# Altium PCB 02.PcbDoc
Units mm, origin at the board's own origin, x right, y up, seen from the top; angles counter-clockwise.
Board outline 59.69 x 72.52 mm, 2 copper layers (Top Layer, Bottom Layer); 31 components, 0 nets, 123 pads, 0 vias.
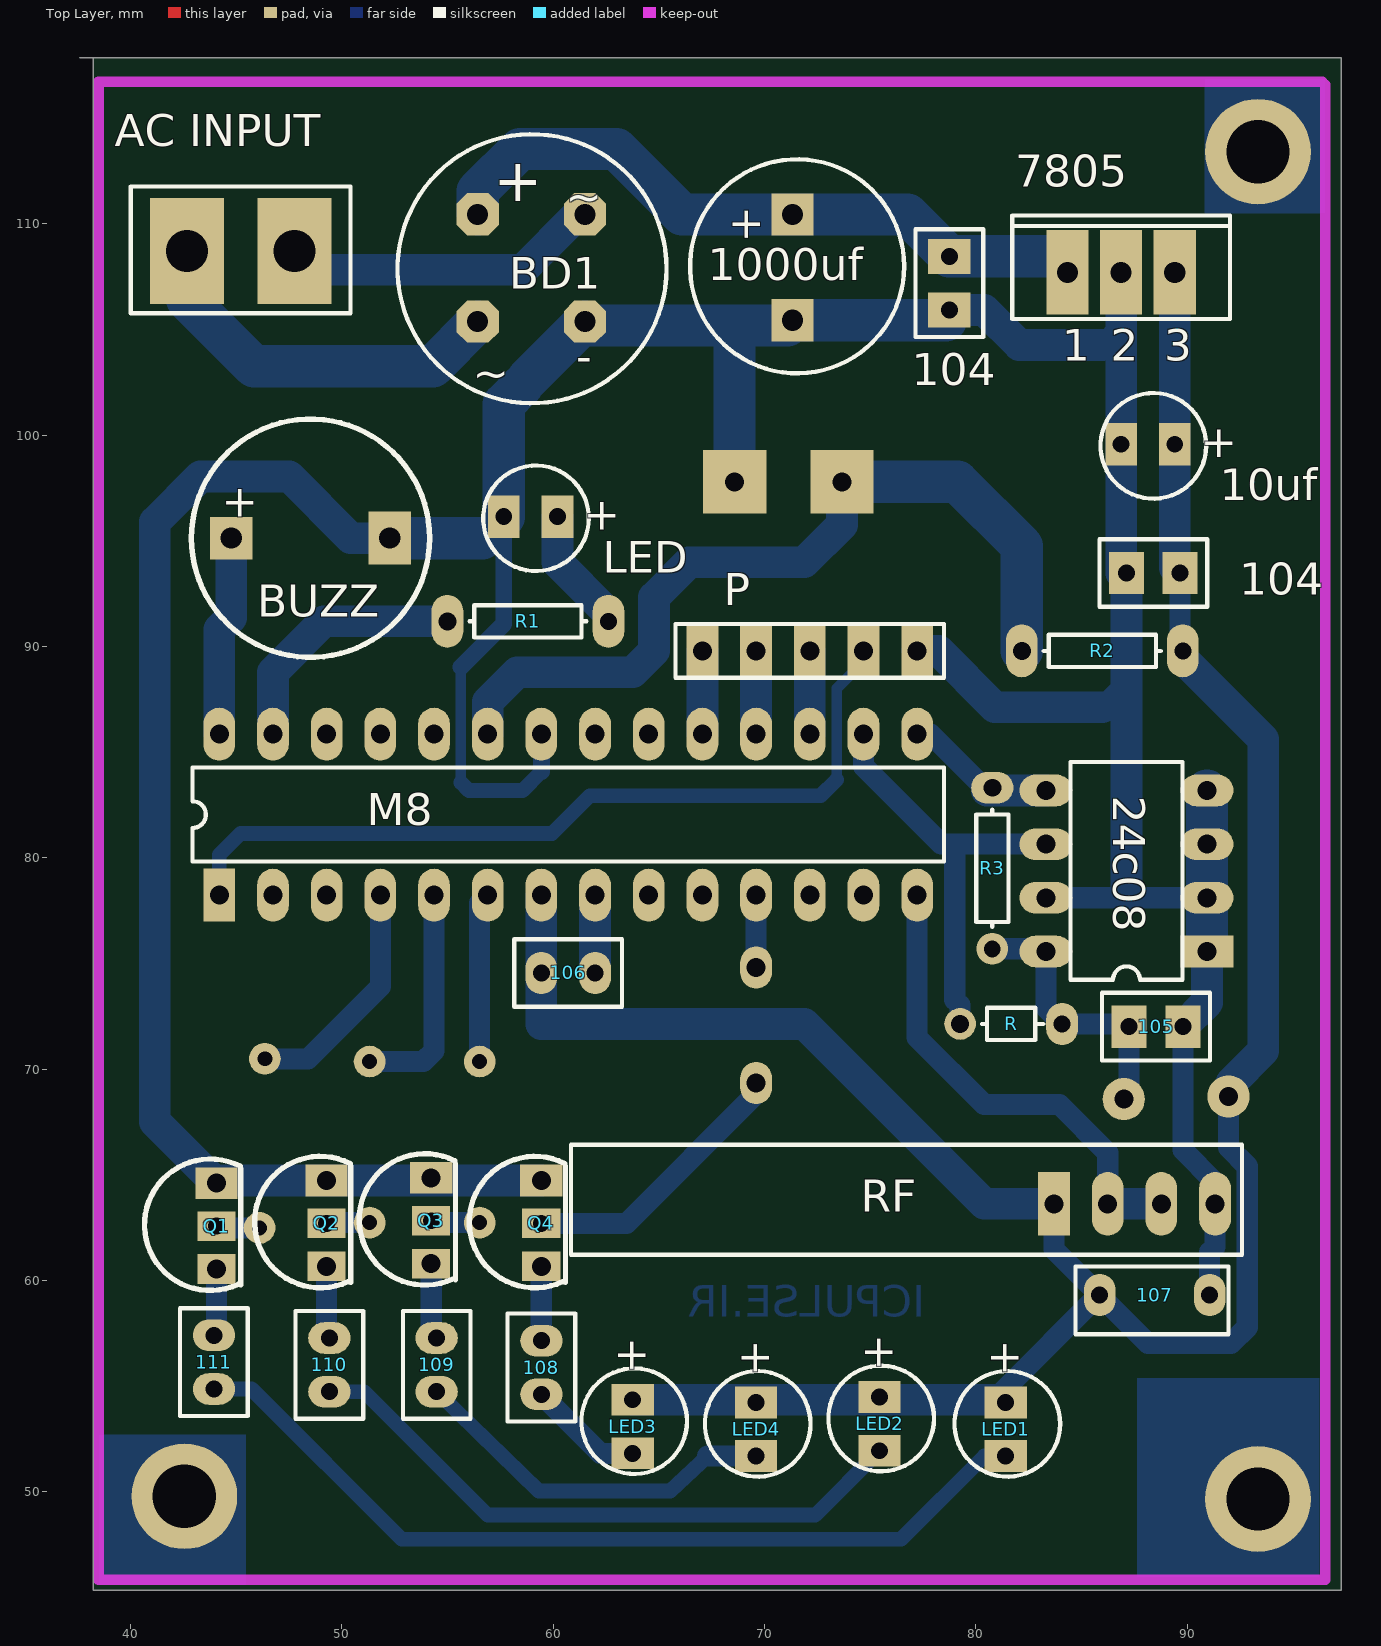
[diagram p0: Top Layer view]
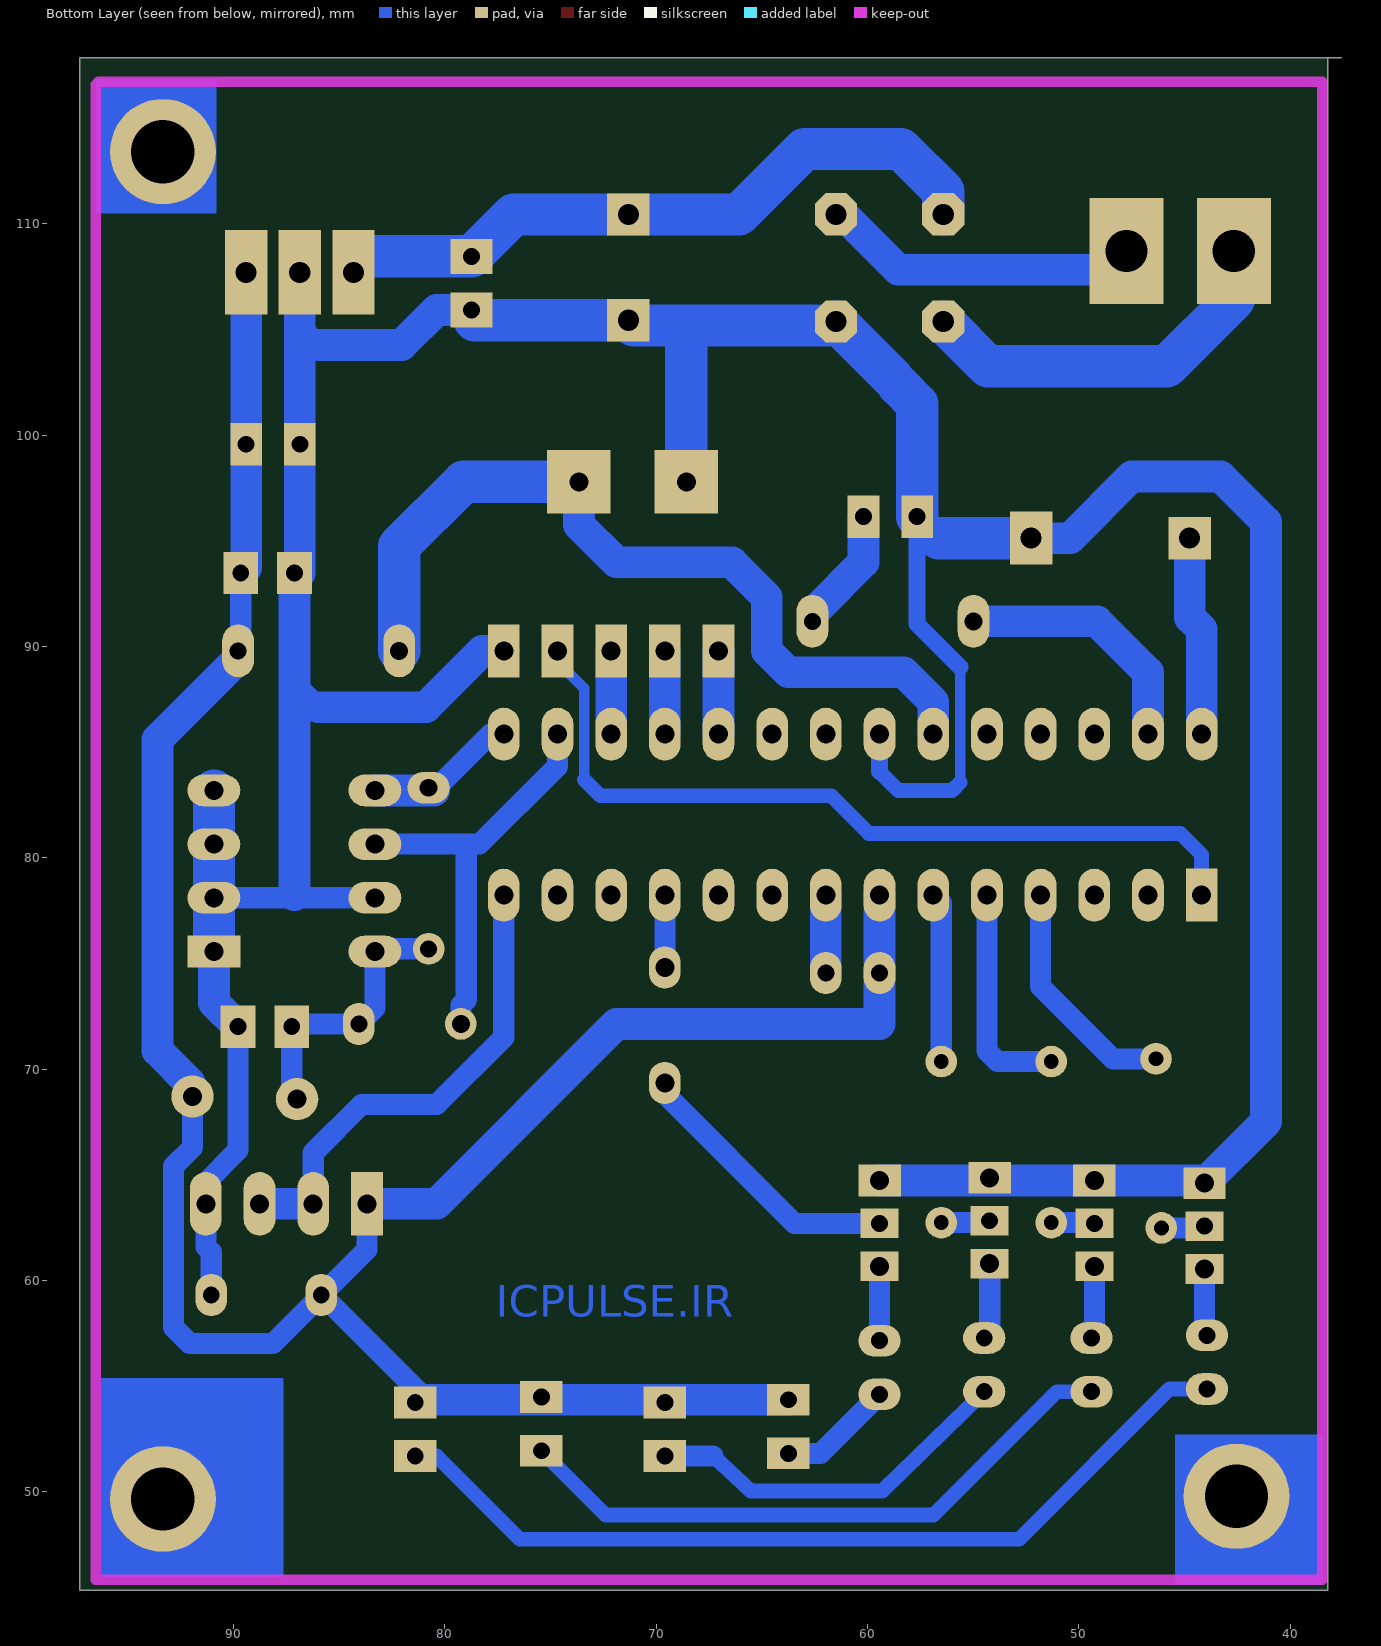
[diagram p1: Bottom Layer view, seen from below]

## Layer stack, top to bottom
Top Solder: solder mask 0.0102, Solder Resist, Dk 3.5
Top Layer: signal copper 0.0356
Dielectric1: dielectric 0.32, FR-4, Dk 4.8
Bottom Layer: signal copper 0.0356
Bottom Solder: solder mask 0.0102, Solder Resist, Dk 3.5

## Board outline
37.592,117.856 97.282,117.856 97.282,45.339 38.227,45.339 38.227,117.856

## Design rules (kind name [scope] priority, off if disabled: settings)
Clearance [All] p1: gap=0.254 ignorepadtopadclearanceinfootprint=FALSE except(0: Arc-Hole Track-Hole SMDPad-Hole THPad-Hole Via-Hole Fill-Hole Poly-Hole Region-Hole Text-Hole)
FabricationTestPointUsage TestPointUsage [All] p1: valid=0 allowmultiple=FALSE
FabricationTestpoint Testpoint [All] p1: side=3 testpointundercomponent=TRUE minsize=1.016 maxsize=2.54 preferedsize=1.524 minholesize=0 maxholesize=1.016 preferedholesize=0.813 testpointgrid=0.025 allowsidetop=TRUE allowsidebottom=TRUE usegrid=TRUE gridtolerance=0
PolygonConnect [All] p1: connectstyle=Relief reliefconductorwidth=0.254 reliefentries=4 polygonreliefangle="90 Angle" airgapwidth=0.254
RoutingVias [All] p1: holewidth=0.711 width=1.27 viastyle="Through Hole" minholewidth=0.711 minwidth=1.27 maxholewidth=0.711 maxwidth=1.27
SolderMaskExpansion [All] p1: expansion=0.102
Width [All] p1: maxlimit=0.254 minlimit=0.254 preferedwidth=0.254
28 further rules are at their usual default settings.

## Components (designator, comment, footprint, x,y, rotation, side; value= is the part's Value field where it differs from the comment)
10uf "100uF" cap02 79.248,94.488 r270 top (schematic designator C5)
24c08 "Comment" DIP-8 87.122,79.375 r90 top
104 "22pF" VP32-3.2#1 78.74,107.188 r90 top (schematic designator C7)
104 "22pF" VP32-3.2#1 88.392,93.472 r180 top (schematic designator C7)
105 "22pF" VP32-3.2#1 88.519,72.009 r180 top (schematic designator C7)
106 "22pF" VP32-3.2#2 60.706,74.549 r180 top (schematic designator C7)
107 "22pF" VP32-3.2#3 87.503,59.055 r180 top (schematic designator C7)
108 "22pF" VP32-3.2#2 59.436,55.88 r270 top (schematic designator C7)
109 "22pF" VP32-3.2#2 54.483,56.007 r270 top (schematic designator C7)
110 "22pF" VP32-3.2#2 49.403,56.007 r270 top (schematic designator C7)
111 "22pF" VP32-3.2#2 43.942,56.134 r270 top (schematic designator C7)
1000uf "Comment" CAPPR5-5x5 71.322,107.937 r270 top
7805 "Comment" TO-262-AA 86.868,107.696 r0 top
"AC INPUT" "Comment" HDR1X2 47.752,108.712 r180 top
BUZZ "Buzzer" Buzzer1 49.784,87.503 r0 top
LED "100uF" cap02 50.038,91.059 r270 top (schematic designator C5)
LED1 "100uF" cap02 86.487,44.069 r0 top (schematic designator C5)
LED2 "100uF" cap02 80.518,44.323 r0 top (schematic designator C5)
LED3 "100uF" cap02 68.834,44.196 r0 top (schematic designator C5)
LED4 "100uF" cap02 74.676,44.069 r0 top (schematic designator C5)
M8 "Comment" 28P3 60.706,82.042 r0 top
P "Comment" HDR1X5 67.056,89.789 r0 top
Q1 "BC546" tr1 54.229,73.279 r90 top
Q2 "BC546" tr1 59.436,73.406 r90 top (schematic designator Q1)
Q3 "BC546" tr1 64.389,73.533 r90 top (schematic designator Q1)
Q4 "BC546" tr1 69.596,73.406 r90 top (schematic designator Q1)
R "Comment" AXIAL-0.3#1 83.058,72.136 r180 top
R1 "Comment" AXIAL-0.3#2 58.801,91.186 r180 top
R2 "Comment" AXIAL-0.3#2 85.979,89.789 r180 top
R3 "Comment" AXIAL-0.3#3 80.772,79.502 r90 top
RF "Comment" HDR1X4 83.693,63.627 r0 top

## Footprints (in the part's own frame and the unit in brackets; to place one, negate y for a bottom-side part, rotate by r counter-clockwise, add the part's x,y. Pads: shape width x height; smd on the part's side, far side on the other; paste and mask are expansions set on the pad)
28P3 [mm] "DIP; 28 Leads; Row Spacing 7.62 mm; Pitch 2.54 mm"
  rect 1.5x2.5 hole 0.9: 1(-16.51,-3.81)
  oval 1.5x2.5 hole 0.9: 2(-13.97,-3.81) 3(-11.43,-3.81) 4(-8.89,-3.81) 5(-6.35,-3.81) 6(-3.81,-3.81) 7(-1.27,-3.81) 8(1.27,-3.81) 9(3.81,-3.81) 10(6.35,-3.81) 11(8.89,-3.81) 12(11.43,-3.81) 13(13.97,-3.81) 14(16.51,-3.81) 15(16.51,3.81) 16(13.97,3.81) 17(11.43,3.81) 18(8.89,3.81) 19(6.35,3.81) 20(3.81,3.81) 21(1.27,3.81) 22(-1.27,3.81) 23(-3.81,3.81) 24(-6.35,3.81) 25(-8.89,3.81) 26(-11.43,3.81) 27(-13.97,3.81) 28(-16.51,3.81)
  silkscreen extent -17.78,-2.23 17.78,2.23
AXIAL-0.3#1 [mm] "Resistor; 2 Leads"
  oval 1.5x2 hole 0.8: 1(-1.016,0)
  round 1.5 hole 0.85: 2(3.81,0)
  silkscreen extent -0.13,-0.76 2.77,0.76
AXIAL-0.3#2 [mm] "Resistor; 2 Leads"
  oval 1.5x2.5 hole 0.8: 1(-3.81,0)
  oval 1.5x2.5 hole 0.85: 2(3.81,0)
  silkscreen extent -2.77,-0.76 2.77,0.76
AXIAL-0.3#3 [mm] "Resistor; 2 Leads"
  round 1.5 hole 0.8: 1(-3.81,0)
  oval 1.5x2 hole 0.85: 2(3.81,0)
  silkscreen extent -2.77,-0.76 2.77,0.76
Buzzer1 [mm]
  rect 2x2 hole 1: 1(-5.02,7.62)
  rect 2x2.5 hole 1: 2(2.48,7.62)
  silkscreen extent -6.91,1.99 4.37,13.25
cap02 [mm]
  rect 2x1.5 hole 0.8: 1(-5.08,10.16) 2(-5.08,7.62)
  silkscreen extent -7.5,6.65 -2.5,11.64
CAPPR5-5x5 [mm] "Capacitor, Electrolytic, Radial; Body 5 x 5 mm (Dia.xH typ); Pin Spacing 5 mm (typ)"
  rect 2x2 hole 1: 1(-2.5,0) 2(2.5,0)
DIP-8 [mm] "DIP; 8 Leads; Row Spacing 7.62 mm; Pitch 2.54 mm"
  rect 1.5x2.5 hole 0.9: 1(-3.81,-3.81)
  oval 1.5x2.5 hole 0.9: 2(-1.27,-3.81) 3(1.27,-3.81) 4(3.81,-3.81) 5(3.81,3.81) 6(1.27,3.81) 7(-1.27,3.81) 8(-3.81,3.81)
  silkscreen extent -5.15,-2.65 5.15,2.65
HDR1X2 [mm] "Connector; Header; 2 Position"
  rect 3.5x5 hole 2: 1(0,0) 2(5.08,0)
  silkscreen extent -2.65,-3.05 7.75,2.95
HDR1X4 [mm] "Connector; Header; 4 Position"
  rect 1.5x3 hole 0.9: 1(0,0)
  oval 1.5x3 hole 0.9: 2(2.54,0) 3(5.08,0) 4(7.62,0)
  silkscreen extent -22.86,-2.41 8.89,2.79
HDR1X5 [mm] "Connector; Header; 5 Position"
  rect 1.5x2.5 hole 0.9: 1(0,0) 2(2.54,0) 3(5.08,0) 4(7.62,0) 5(10.16,0)
  silkscreen extent -1.27,-1.27 11.43,1.27
TO-262-AA [mm] "TO, Thru-Hole, Vertical, Heatsink Mounted; 3 In-Line Leads; Pitch 2.54 mm"
  rect 2x4 hole 1: 1(-2.54,0) 2(0,0) 3(2.54,0)
  silkscreen extent -5.15,-2.2 5.15,2.7
tr1 [mm]
  rect 1.5x2 hole 0.9: 1(-8.675,10.165)
  rect 1.4x1.8 hole 0.8: 2(-10.707,10.165)
  rect 1.4x1.8 hole 0.9: 3(-12.739,10.165)
  silkscreen extent -13.75,9.02 -7.54,13.57
VP32-3.2#1 [mm] "Capacitor, Ceramic, Thru-Hole, Dipped Radial; Body 5.1 x 3.2 mm (WxT) Pin Spacing 2.54 mm (typ)"
  rect 1.65x2 hole 0.8: 1(-1.27,0) 2(1.27,0)
  silkscreen extent -2.55,-1.6 2.55,1.6
VP32-3.2#2 [mm] "Capacitor, Ceramic, Thru-Hole, Dipped Radial; Body 5.1 x 3.2 mm (WxT) Pin Spacing 2.54 mm (typ)"
  oval 1.5x2 hole 0.8: 1(-1.27,0) 2(1.27,0)
  silkscreen extent -2.55,-1.6 2.55,1.6
VP32-3.2#3 [mm] "Capacitor, Ceramic, Thru-Hole, Dipped Radial; Body 5.1 x 3.2 mm (WxT) Pin Spacing 2.54 mm (typ)"
  oval 1.5x2 hole 0.8: 1(-3.556,-0.254) 2(1.651,-0.254)
  silkscreen extent -4.44,-1.6 2.79,1.6

## Part data
10uf LED LED1 LED2 LED3 LED4: library part "Cap Pol1", "Polarized Capacitor (Radial)"
24c08 7805 M8 P R R1 R2 R3 RF: library part COAX-M
104 104 105 106 107 108 109 110 111: library part Cap, "Capacitor"
1000uf: library part "Header 8"
"AC INPUT": library part MAX7219CNG
BUZZ: "Magnetic Transducer Buzzer"
Q1 Q2 Q3 Q4: library part 2N3904, "NPN General Purpose Amplifier"

## Free pads (board coordinates)
  rect 3x3 hole 0.9: 0(73.66,97.79) 1(68.58,97.79)
  oct 2x2 hole 1: 1(56.422,110.446) 2(61.497,110.446) 3(61.497,105.371) 4(56.422,105.371)
  round 1.5 hole 0.7: 2(56.515,62.738) 3(56.515,70.358) 4(51.308,62.738) 5(51.308,70.358) 6(46.101,62.484) 7(46.355,70.485)
  round 2 hole 0.9: 2(91.948,68.707) 3(86.995,68.58)
  oval 1.5x2 hole 0.9: 6(69.596,74.803) 7(69.596,69.342)
  round 5 hole 3: 8(42.545,49.784) 9(93.345,113.411) 10(93.345,49.657)

## Nets (pads, with @x,y where several pads share a name; then routed paths per layer and width w, separated by ;. In a path a pad name is that pad's centre, name@x,y a point inside that pad or via, vN(x,y) a via of type N, cw(c..) or ccw(c..) an arc to the next point about the centre after c; other vN are vias at no path point)
pads on no net: 10uf.1 10uf.2 24c08.1 24c08.2 24c08.3 24c08.4 24c08.5 24c08.6 24c08.7 24c08.8 104.1 104.2 105.1 105.2 106.1 106.2 107.1 107.2 108.1 108.2 109.1 109.2 110.1 110.2 111.1 111.2 1000uf.1 1000uf.2 7805.1 7805.2 7805.3 "AC INPUT.1" "AC INPUT.2" BUZZ.1 BUZZ.2 LED1.1 LED1.2 LED2.1 LED2.2 LED3.1 LED3.2 LED4.1 LED4.2 LED.1 LED.2 M8.1 M8.2 M8.3 M8.4 M8.5 M8.6 M8.7 M8.8 M8.9 M8.10 M8.11 M8.12 M8.13 M8.14 M8.15 M8.16 M8.17 M8.18 M8.19 M8.20 M8.21 M8.22 M8.23 M8.24 M8.25 M8.26 M8.27 M8.28 P.1 P.2 P.3 P.4 P.5 Q1.1 Q1.2 Q1.3 Q2.1 Q2.2 Q2.3 Q3.1 Q3.2 Q3.3 Q4.1 Q4.2 Q4.3 R1.1 R1.2 R2.1 R2.2 R3.1 R3.2 R.1 R.2 RF.1 RF.2 RF.3 RF.4
copper on no net: | length 748.6
  Bottom Layer w0.254: 44.064,62.572 44.152,62.484 ; 44.064,64.604 44.191,64.731 ; 47.879,109.22 49.276,107.823 ; 49.271,57.409 49.403,57.277 ; 49.271,62.699 49.31,62.738 ; 54.224,62.826 54.312,62.738 ; 56.163,105.566 56.261,105.664 ; 56.363,105.312 56.422,105.371 ; 56.422,110.329 56.422,110.446 ; 56.515,77.851 56.896,78.232 ; 56.852,110.446 56.422,110.446 ; 57.194,110.446 56.422,110.446 ; 61.17,110.446 61.497,110.446 61.424,110.446 ; 61.497,105.185 61.497,105.371 ; 68.58,105.058 68.707,105.185 ; 69.596,68.834 69.596,69.342 ; 71.07,105.185 71.322,105.437 ; 71.286,105.752 71.374,105.664 ; 72.136,78.232 72.263,78.105 ; 74.676,88.9 74.676,89.789 74.676,89.281 ; 77.216,85.852 77.851,85.852 ; 77.216,105.31 77.343,105.437 ; 78.586,105.437 78.74,105.591 78.74,105.918 ; 78.994,73.279 79.248,73.025 ; 81.28,54.775 81.28,54.356 81.407,54.229 ; 83.185,75.692 83.312,75.565 ; 83.566,108.458 84.328,107.696 ; 86.487,72.39 87.503,72.39 ; 86.741,68.707 87.249,69.215 ; 86.868,93.472 86.995,93.345 ; 86.868,105.156 86.868,107.696 ; 87.122,72.136 87.249,72.009 ; 87.122,78.232 87.249,78.105 ; 89.408,93.726 89.662,93.472 ; 89.662,89.916 89.789,89.789 89.789,89.408 ; 91.059,61.341 91.313,61.595 ; 91.948,68.199 91.948,68.707 91.948,69.215 92.454,69.721
  Bottom Layer w0.5: 55.626,83.566 55.626,89.027 ; 73.406,83.693 73.406,88.011 74.676,89.281
  Bottom Layer w0.7: 43.942,54.864 45.72,54.864 52.832,47.752 76.454,47.752 80.391,51.689 81.407,51.689 ; 44.196,78.232 44.196,80.137 45.212,81.153 59.944,81.153 61.722,82.931 72.644,82.931 73.406,83.693 ; 49.403,54.737 51.054,54.737 56.896,48.895 72.39,48.895 75.438,51.943 ; 54.483,54.737 59.309,50.038 65.532,50.038 67.31,51.689 ; 55.626,83.566 56.007,83.185 58.547,83.185 59.436,84.074
  Bottom Layer w0.8: 55.626,89.027 57.658,91.059 57.658,96.139 ; 59.436,84.074 59.436,85.852
  Bottom Layer w1: 44.064,57.526 44.064,60.54 ; 44.152,62.484 46.101,62.484 ; 46.355,70.485 48.387,70.485 51.816,73.914 51.816,78.232 ; 49.271,57.409 49.271,60.667 ; 49.31,62.738 51.308,62.738 ; 51.308,70.358 53.848,70.358 54.356,70.866 54.356,78.232 ; 54.224,57.536 54.224,60.794 ; 54.312,62.738 56.515,62.738 ; 56.515,70.358 56.515,77.851 ; 59.431,57.155 59.431,60.667 ; 59.431,62.699 63.461,62.699 69.596,68.834 ; 59.436,54.61 62.23,51.816 63.754,51.816 ; 67.31,51.689 69.596,51.689 ; 69.596,74.803 69.596,78.232 ; 74.676,85.852 74.676,84.328 78.359,80.645 83.312,80.645 ; 77.216,78.232 77.216,71.501 80.391,68.326 83.947,68.326 86.233,66.04 86.233,63.627 ; 77.851,85.852 80.518,83.185 ; 78.994,73.279 78.994,80.645 ; 79.248,72.136 79.248,73.025 ; 80.772,75.692 83.185,75.692 ; 81.28,54.775 85.833,59.328 ; 83.312,75.565 83.312,72.898 84.074,72.136 87.122,72.136 ; 83.312,78.105 90.932,78.105 ; 83.693,63.627 83.693,61.468 88.138,57.023 92.075,57.023 92.837,57.785 92.837,65.405 91.948,66.294 91.948,66.802 91.948,68.707 ; 85.979,87.122 87.122,88.265 ; 85.979,104.267 86.868,105.156 ; 87.249,69.215 87.249,70.739 87.249,72.009 ; 89.662,89.916 89.662,93.472 ; 89.789,68.199 89.789,72.009 ; 89.789,68.453 89.789,66.167 91.313,64.643 91.313,63.627 91.313,61.595 ; 91.059,59.309 91.059,61.341
  Bottom Layer w1.5: 42.672,106.426 42.672,108.712 ; 44.064,64.604 41.148,67.52 41.148,95.885 43.307,98.044 47.498,98.044 50.419,95.123 52.264,95.123 ; 44.191,64.731 59.431,64.731 ; 44.196,85.852 44.196,90.805 44.764,91.373 44.764,95.123 ; 46.736,85.852 46.736,88.773 49.149,91.186 54.991,91.186 ; 49.276,107.823 58.547,107.823 61.17,110.446 ; 56.896,85.852 56.896,87.376 58.293,88.773 63.754,88.773 64.77,89.789 64.77,92.329 66.421,93.98 71.882,93.98 73.66,95.758 73.66,97.79 ; 59.436,78.232 59.436,74.549 59.436,72.136 71.882,72.136 80.391,63.627 83.693,63.627 ; 60.198,96.139 60.198,93.98 62.484,91.694 ; 61.976,74.549 61.976,78.232 ; 63.754,54.356 81.28,54.356 ; 67.056,85.852 67.056,89.789 ; 69.596,85.852 69.596,89.789 ; 72.136,85.852 72.136,89.789 ; 77.216,89.789 78.232,89.789 80.899,87.122 85.979,87.122 ; 78.74,105.918 80.391,105.918 82.042,104.267 85.979,104.267 ; 80.518,83.185 83.312,83.185 ; 86.233,63.627 88.773,63.627 ; 86.868,93.472 86.868,107.696 ; 87.122,78.232 87.122,88.265 87.122,93.472 ; 89.408,93.726 89.408,107.696 ; 89.789,72.009 90.932,73.152 90.932,75.565 ; 89.789,89.408 93.599,85.598 93.599,70.866 92.075,69.342
  Bottom Layer w2: 42.672,106.426 45.847,103.251 54.302,103.251 56.422,105.371 ; 52.264,95.123 56.641,95.123 ; 56.422,110.446 56.422,111.54 58.42,113.538 62.992,113.538 66.093,110.437 76.76,110.437 78.74,108.458 83.566,108.458 ; 57.658,96.139 57.658,101.473 58.547,102.362 ; 58.801,102.675 61.497,105.371 ; 61.497,105.185 71.07,105.185 ; 68.58,97.79 68.58,105.058 ; 71.322,105.437 78.586,105.437 ; 73.66,97.79 79.121,97.79 82.169,94.742 82.169,89.789 ; 90.932,75.565 90.932,83.185

## Keep-outs
Keep-Out Layer:
  lines w0.254: 96.393,116.713 96.52,116.586
  lines w0.5: 96.393,116.713 38.481,116.713 38.481,45.847 96.52,45.847 96.52,116.586

## Other copper
Bottom Layer:
  rectangle: 90.805,110.49 96.52,116.84
  rectangle: 87.63,45.974 96.266,55.372
  rectangle: 38.481,45.593 45.466,52.705
  text "ICPULSE.IR" at 77.597,58.293 h1.5

## Silkscreen, mask and mechanical layers (free items; w line width, h text height)
Top Overlay:
  circle w0.2: c58.997,107.871 r6.366
  circle w0.2: c71.537,107.987 r5.065
  text "+" at 57.172,111.071 h2
  text "~" at 60.597,110.546 h1.5
  text "BD1" at 57.912,106.934 h1.5
  text "-" at 61.097,102.996 h1.5
  text "~" at 56.197,102.196 h1.5

## Text inside footprints (layer, text, board x,y; h text height)
10uf: Top Overlay "+" at 92.367,100.242 h1.5 r180
1000uf: Top Overlay "+" at 68.497,110.837 h1.5 r270
7805: Top Overlay "1" at 84.078,103.521 h1.5; Top Overlay "2" at 86.368,103.521 h1.5; Top Overlay "3" at 88.908,103.521 h1.5
BUZZ: Top Overlay "+" at 44.323,96.139 h1.5
LED: Top Overlay "+" at 63.157,96.813 h1.5 r180
LED1: Top Overlay "+" at 80.733,57.188 h1.5 r270
LED2: Top Overlay "+" at 74.764,57.442 h1.5 r270
LED3: Top Overlay "+" at 63.08,57.315 h1.5 r270
LED4: Top Overlay "+" at 68.922,57.188 h1.5 r270